# Altium PCB PCB_Hist_Prep.PcbDoc
Units mil, origin at the board's own origin, x right, y up, seen from the top; angles counter-clockwise.
Board outline 1968.5 x 2755.91 mil, 2 copper layers (Top Layer, Bottom Layer); 16 components, 28 nets, 91 pads, 9 vias.
Unrouted connection lines stored in the file: 1.
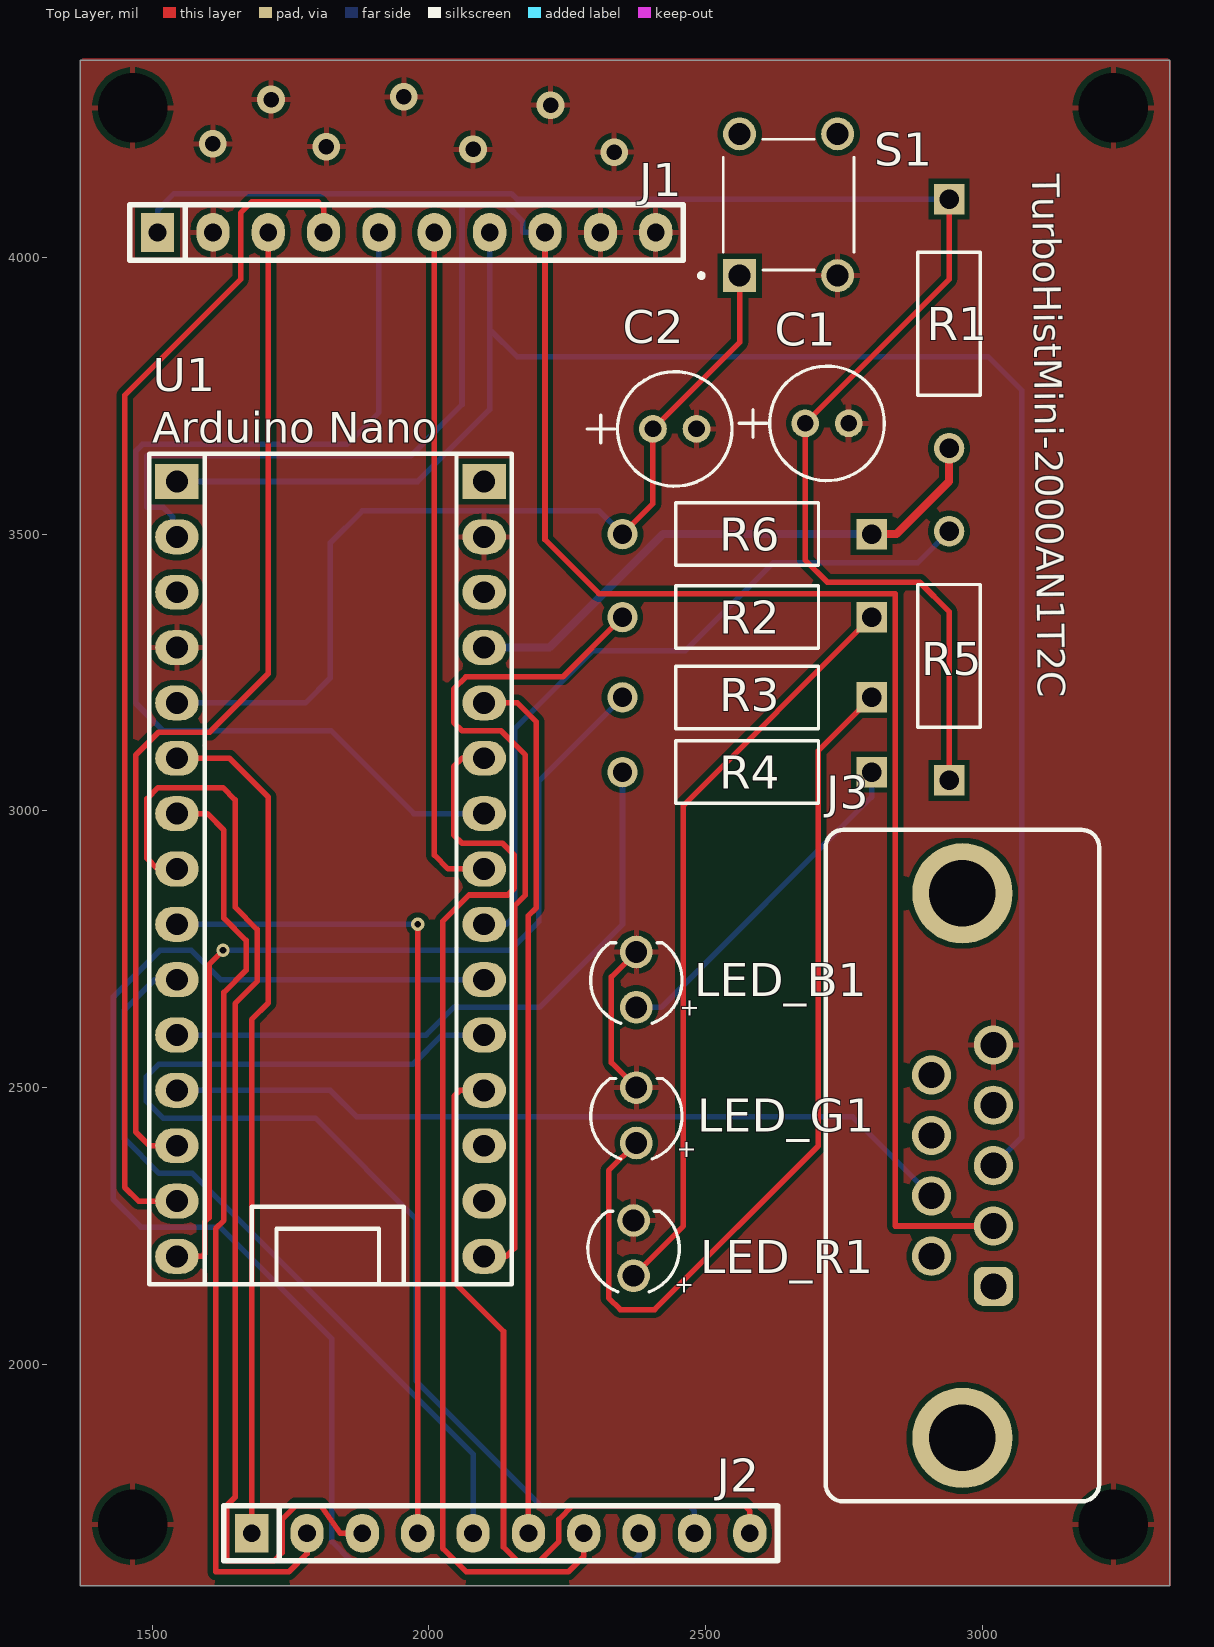
[diagram p0: Top Layer view]
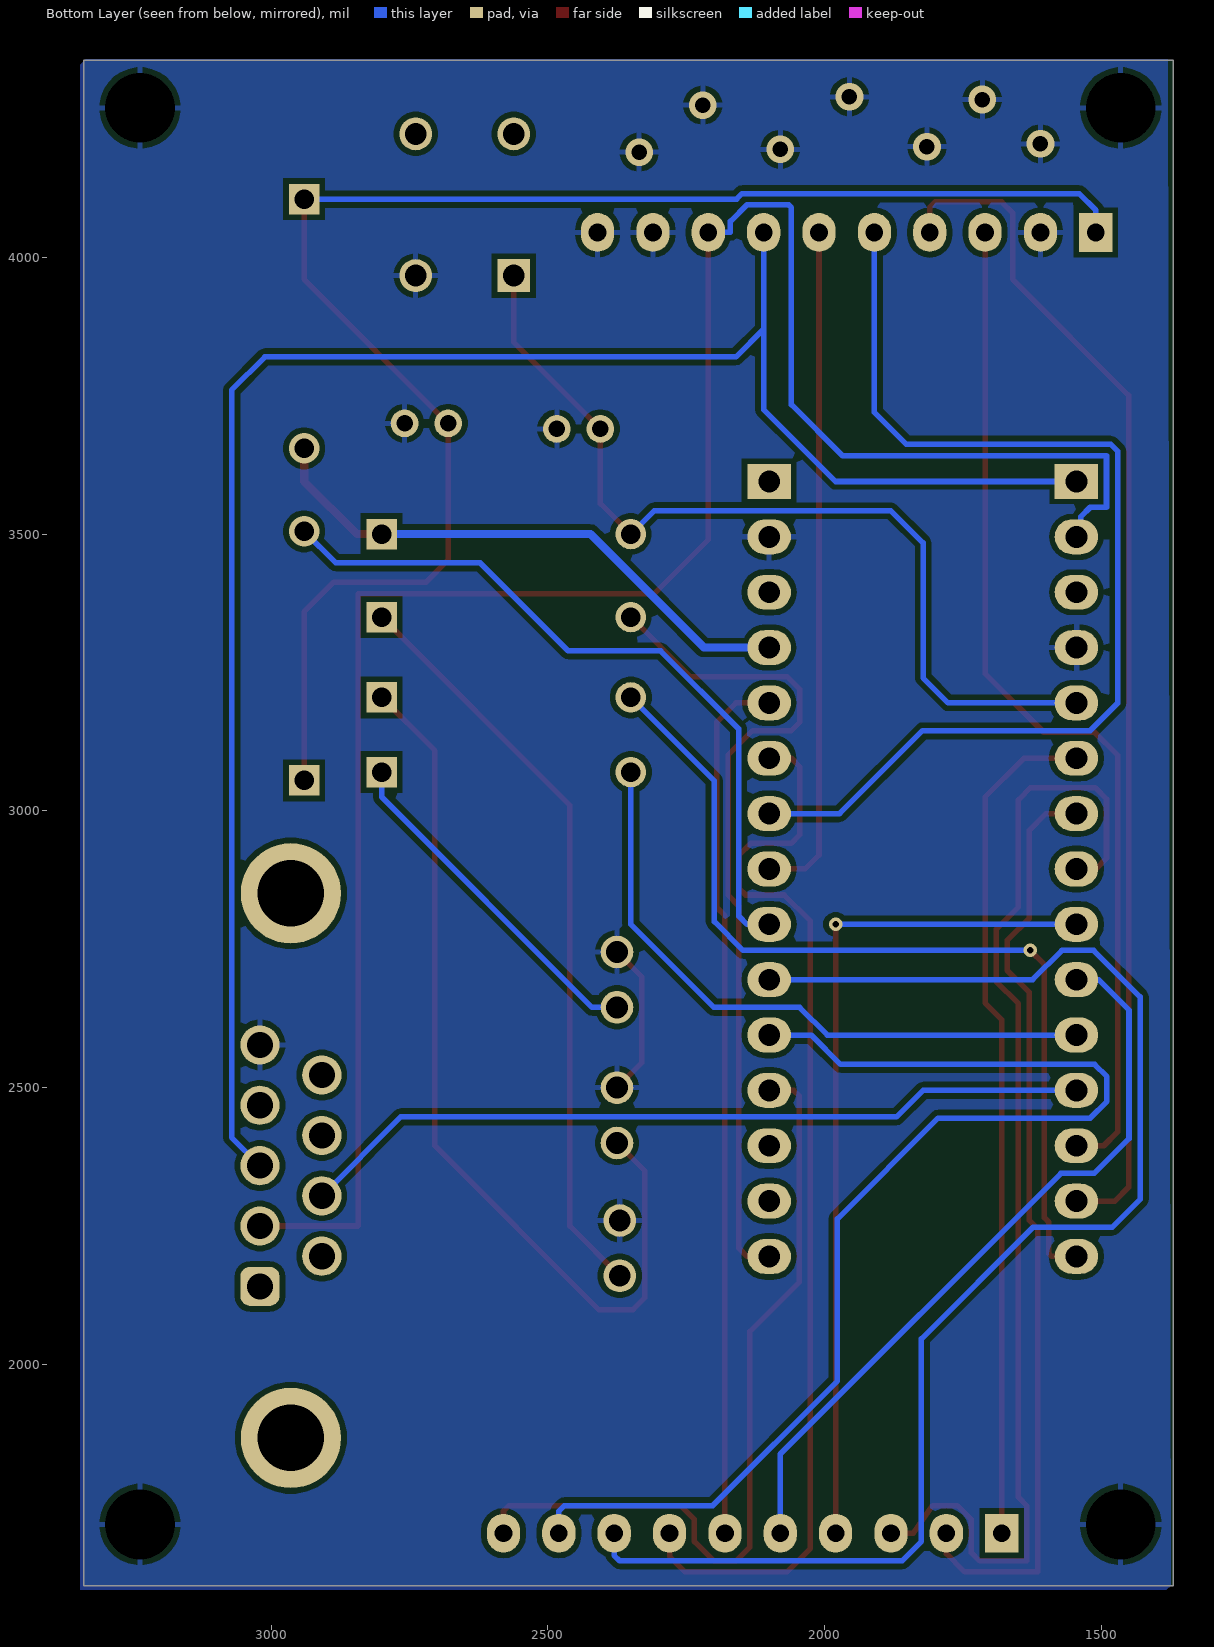
[diagram p1: Bottom Layer view, seen from below]
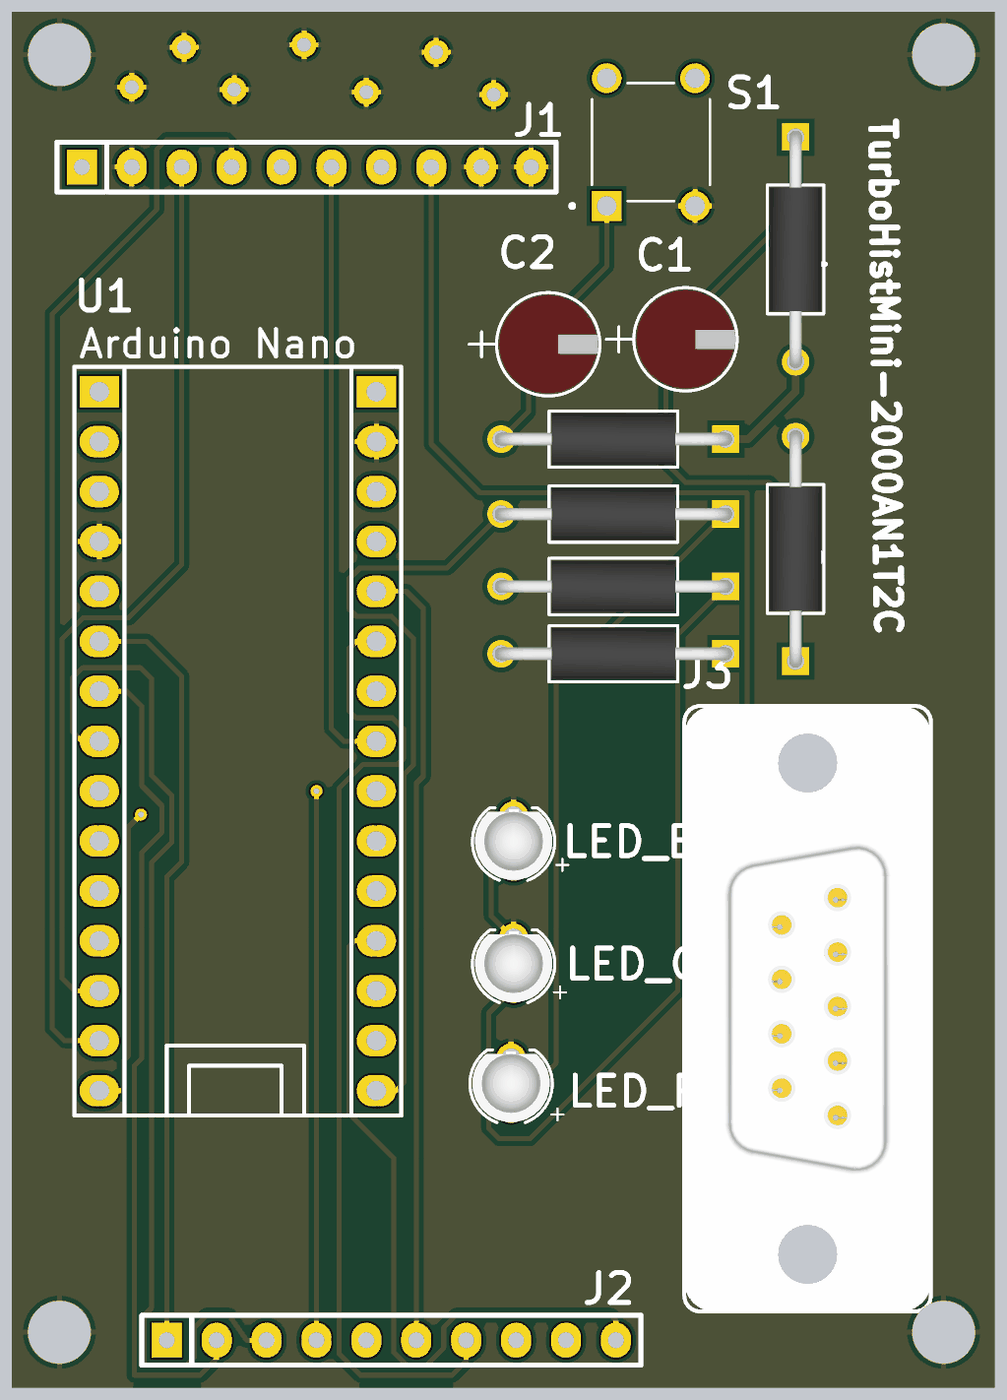
[diagram p2: 3D render of the assembled board from above, using the file's embedded part models]

## Layer stack, top to bottom
Top Solder: solder mask 0.4, Solder Resist, Dk 3.5
Top Layer: signal copper 1.4
Dielectric 1: dielectric 12.6, FR-4, Dk 4.8
Bottom Layer: signal copper 1.4
Bottom Solder: solder mask 0.4, Solder Resist, Dk 3.5

## Board outline
1370,1600 1370,4355.91 3338.5,4355.91 3338.5,1600
board region "Layer Stack Region 1": 1370,1600 1370,4355.91 3338.5,4355.91 3338.5,1600
board region "Default Layer Stack Region": 1000,1000 7000,1000 7000,5000 1000,5000

## Design rules (kind name [scope] priority, off if disabled: settings)
Clearance [All] p1: gap=10 ignorepadtopadclearanceinfootprint=FALSE
PolygonConnect [All] p1: connectstyle=Relief reliefconductorwidth=10 reliefentries=4 polygonreliefangle="90 Angle" airgapwidth=10
RoutingVias [All] p1: holewidth=12 width=24 viastyle="Through Hole" minholewidth=2 minwidth=5 maxholewidth=28 maxwidth=50
SolderMaskExpansion [All] p1: expansion=4 istentingtop=FALSE
SupplyNets "Schematic Supply Nets_2" [InNet('GND')] p1: voltage=0.000
SupplyNets "Schematic Supply Nets_1" [InNet('VCC')] p2: voltage=0.000
Width Width_1 [InNet('VCC')] p1: maxlimit=18 minlimit=10 preferedwidth=15 minimp=50.000000 maximp=50.000000 favimp=50.000000
Width [All] p2: maxlimit=10 minlimit=10 preferedwidth=10
30 further rules are at their usual default settings.

## Components (designator, comment, footprint, x,y, rotation, side; value= is the part's Value field where it differs from the comment)
C1 "100uF" CAP_UKL_5X11_NCH 2680,3700 r0 top
C2 "0.1uF" CAP_UKL_5X11_NCH 2405,3690 r0 top
J1 "CON10" sip10 1510,4045 r0 top
J2 "CON10" sip10 1680,1695 r0 top
J3 "61800925123" 61800925123 2964.09,2359.06 r270 top
LED_B1 "Super Red, 2V, 40°" WL-TMRC_D3.95H5.3 2375,2695 r90 top
LED_G1 "Super Red, 2V, 40°" WL-TMRC_D3.95H5.3 2375,2450 r90 top
LED_R1 "Super Red, 2V, 40°" WL-TMRC_D3.95H5.3 2370,2210 r90 top
R1 "10K" STA_CF14_STP 2940,4105 r270 top
R2 "2.2" STA_CF14_STP 2800,3350 r180 top
R3 "10K" STA_CF14_STP 2800,3205 r180 top
R4 "10K" STA_CF14_STP 2800,3070 r180 top
R5 "330" STA_CF14_STP 2940,3055 r90 top
R6 "4.7K" STA_CF14_STP 2800,3500 r180 top
S1 "TS02-66-43-BK-100-LCR-D" SW_TS02-66-43-BK-100-LCR-D 2650,4095 r90 top
U1 "Arduino Nano" PCBComponent_1 1815,2855 r90 top

## Footprints (in the part's own frame and the unit in brackets; to place one, negate y for a bottom-side part, rotate by r counter-clockwise, add the part's x,y. Pads: shape width x height; smd on the part's side, far side on the other; paste and mask are expansions set on the pad)
61800925123 [mm] "9 pins, straight"
  rrect50% 1.8x1.8 hole 1.2: 1(5.54,1.42)
  round 1.8 hole 1.2: 2(2.77,1.42) 3(0,1.42) 4(-2.77,1.42) 5(-5.54,1.42) 6(4.155,-1.42) 7(1.385,-1.42) 8(-1.385,-1.42) 9(-4.155,-1.42)
  round 4.6 hole 3.05: M1(-12.495,0) M2(12.495,0)
  silkscreen extent -15.41,-6.27 15.4,6.28, body extent -15.4,-6.27 15.4,6.27, height 12.95
CAP_UKL_5X11_NCH [mil]
  round 50 / inner round 60 / far side round 50 hole 30 paste-99999 mask+0: 1(0,0) 2(78.74,0)
  silkscreen extent -119,-103 143,103, body extent -59,-98 139,98, height 473
PCBComponent_1 [mm]
  rect 1.6x2 hole 1: 1(18.796,6.858) 30(18.796,-7.239)
  oval 1.6x2 hole 1: 2(16.256,6.858) 3(13.716,6.858) 4(11.176,6.858) 5(8.636,6.858) 6(6.096,6.858) 7(3.556,6.858) 8(1.016,6.858) 9(-1.524,6.858) 10(-4.064,6.858) 11(-6.604,6.858) 12(-9.144,6.858) 13(-11.684,6.858) 14(-14.224,6.858) 15(-16.764,6.858) 16(-16.764,-7.239) 17(-14.224,-7.239) 18(-11.684,-7.239) 19(-9.144,-7.239) 20(-6.604,-7.239) 21(-4.064,-7.239) 22(-1.524,-7.239) 23(1.016,-7.239) 24(3.556,-7.239) 25(6.096,-7.239) 26(8.636,-7.239) 27(11.176,-7.239) 28(13.716,-7.239) 29(16.256,-7.239)
  silkscreen extent -18.03,-8.51 20.07,8.13
sip10 [mil]
  rect 60x70 hole 32: 1(0,0)
  oval 60x70 hole 32: 2(100,0) 3(200,0) 4(300,0) 5(400,0) 6(500,0) 7(600,0) 8(700,0) 9(800,0) 10(900,0)
  silkscreen extent -50,-50 950,50
STA_CF14_STP [mil]
  rect 55x55 / inner round 60 / far side rect 55x55 hole 35 paste-99999 mask+0: 1(0,0)
  round 55 / inner round 60 / far side round 55 hole 35 paste-99999 mask+0: 2(450,0)
  silkscreen extent 96,-56 354,57, body extent -12,-51 462,51, height 103
SW_TS02-66-43-BK-100-LCR-D [mm]
  rect 1.508x1.508 / inner round 1.508 / far side rect 1.508x1.508 hole 1: 1(-3.25,2.25)
  round 1.508 hole 1: 2(3.25,2.25) 3(-3.25,-2.25) 4(3.25,-2.25)
  silkscreen extent -3.35,-3 3,4.1
WL-TMRC_D3.95H5.3 [mm] "THT Mono-color Round Color LED, 2-leads"
  round 1.5 hole 1: 1(-1.27,0) 2(1.27,0)
  silkscreen extent -2,-2.1 1.69,2.1, body extent -1.99,-1.97 1.63,1.97, height 5.35

## Part data
C1 C2: library part UKL1H0R1MDDANATA, "No Description Available", Mfr_Name=Nichicon
J3: "WR-DSUB Female PCB Connector, Straight, 9p", Contact Resistance=300mOhm, Manufacturer="Wurth Elektronik", Operating Temperature Max=105°C, Operating Temperature Min=-55°C, Rated Current=3A, Withstanding Voltage=1000VAC, Working Voltage=125VAC, Category="Input/Output Connectors", ComponentLink1Description="Website Link", ComponentLink1URL=https://www.we-online.com/redexpert/article/61800925123?ad, ComponentLink2Description="Datasheet Link", ComponentLink2URL=https://www.we-online.com/redexpert/spec/61800925123?ad, Gender=Female, Manufacturer Part Number=61800925123, Match Code=WR-DSUB, Mount="Through Hole", Number of Pins=9, Orientation=Straight, Packaging=Tube
LED_B1 LED_G1 LED_R1: library part 151031SS04000, "WL-TMRC Mono-color Round Color, THT, D3.95 x H5.3mm, Super Red, 2V, 40°", Case/Size Code=3mm, Emitting Color="Super Red", Forward Voltage=2V, Manufacturer="Wurth Elektronik", Operating Temperature Max=85°C, Operating Temperature Min=-40°C, Category="Signal LEDs", Chip Technology=AlInGaP, ComponentLink1Description="Website Link", ComponentLink1URL=https://www.we-online.com/redexpert/article/151031SS04000?ad, ComponentLink2Description="Datasheet Link", ComponentLink2URL=https://www.we-online.com/redexpert/spec/151031SS04000?ad, Diameter=3.95mm, Dominant Wavelength=635nm, Height=5.3mm, Luminous Intensity=160mcd, Manufacturer Part Number=151031SS04000, Match Code=WL-TMRC, Mount="Through Hole", Packaging=Bulk, Peak Wavelength=640nm, Viewing Angle=40°
R1 R2 R3 R4 R5 R6: library part CF14JT1K00, "No Description Available", Mfr_Name="Stackpole International"
S1: "6 x 6 mm, 4.3 mm Actuator Height, 100 gf, Black, Long Crimped, Through Hole, SPST, Tactile Switch", Package=None, Availability="In Stock", Check_prices=https://www.snapeda.com/parts/TS02-66-43-BK-100-LCR-D/CUI+Devices/view-part/?ref=eda, CUI_purchase_URL=https://www.cuidevices.com/product/switches/tactile-switches/ts02-series?utm_source=snapeda.com&utm_medium=referral&utm_campaign=snapedaBOM, MF="CUI Devices", MP=TS02-66-43-BK-100-LCR-D, Price=None, Purchase-URL=https://pricing.snapeda.com/search/part/TS02-66-43-BK-100-LCR-D/?ref=eda, SnapEDA_Link=https://www.snapeda.com/parts/TS02-66-43-BK-100-LCR-D/CUI+Devices/view-part/?ref=snap
U1: library part Component_1

## Free pads (board coordinates)
  round 60 hole 125.98: 12(1465,1710.94) 12(1465,4270) 13(3236.65,1710.94) 14(3236.65,4270)

## Via types
v1: diameter 50, hole 28, Top Layer to Bottom Layer, 7 vias
v2: diameter 24, hole 12, Top Layer to Bottom Layer, 2 vias

## Nets (pads, with @x,y where several pads share a name; then routed paths per layer and width w, separated by ;. In a path a pad name is that pad's centre, name@x,y a point inside that pad or via, vN(x,y) a via of type N, cw(c..) or ccw(c..) an arc to the next point about the centre after c; other vN are vias at no path point)
A0: J2.10 U1.19 | length 1474.7
  Top Layer w10: U1.19 2056,2495 2045.63,2484.63 2045.63,2149 2135,2059.63 2135,1670 2160,1645 2200,1645 2235,1680 2235,1720 2260,1745 2570,1745 2580,1735 J2.10
A1: J2.9 U1.20 | length 2194.2
  Bottom Layer w10: U1.20 2024,2595 1971,2542 1512,2542 1490,2520 1490,2475 1520,2445 1795,2445 1977,2263 1977,1970 2202,1745 2470,1745 2480,1735 J2.9
A2: J2.8 U1.21 | length 2571.8
  Bottom Layer w10: U1.21 1624,2695 1571,2748 1514,2748 1430,2664 1430,2298 1480,2248 1623,2248 1825,2046 1825,1680 1860,1645 2370,1645 2380,1655 J2.8
A6: J2.7 U1.25 | length 1981.3
  Top Layer w10: U1.25 2060,3095 2045,3080 2045,2956.5 2060,2941.5 2132.87,2941.5 2154.37,2920 2154.37,2860 2142.37,2848 2073,2848 2025.63,2800.63 2025.63,1667.37 2068,1625 2252,1625 2280,1653 J2.7
A7: J2.6 U1.26 | length 1580.2
  Top Layer w10: U1.26 2160,3195 2194.37,3160.63 2194.37,2825 2180,2810.63 J2.6
COOL_PWM: J1.4 U1.14 | length 2158.9
  Top Layer w10: U1.14 1475.63,2295 1450.63,2320 1450.63,3750.63 1660,3960 1660,4080 1680,4100 1800,4100 1810,4090 J1.4
D3: J2.1 U1.6 | length 1536.4
  Top Layer w10: U1.6 1640,3095 1710,3025 1710,2653 1680,2623 J2.1
D4: J2.2 U1.7 | length 1692.4
  Top Layer w10: U1.7 1600,2995 1630,2965 1630,2806 1670,2766 1670,2712 1630,2672 1630,2260 1615,2245 1615,1625 1747,1625 1780,1658 J2.2
D5: J2.3 U1.8 | length 2108.5
  Top Layer w10: U1.8 1510,2895 1490.63,2914.37 1490.63,3021.63 1511,3042 1628,3042 1650,3020 1650,2826 1690,2786 1690,2692 1650,2652 1650,1760 1635,1745 1635,1645 1720,1645 1735,1660 1735,1720 1760,1745 1805,1745 1840,1695 J2.3
D6: J2.4 U1.9 | length 1535
  Top Layer w10: J2.4 v2(1980,2795)
  Bottom Layer w10: U1.9 v2(1980,2795)
D7: J2.5 U1.10 | length 1358.9
  Bottom Layer w10: U1.10 1505,2695 1450,2640 1450,2408 1513,2345 1573,2345 2080,1838 J2.5
GND: C1.2 C2.2 J1.2 J1.9 J1.10 J3.5 LED_B1.2 LED_G1.2 LED_R1.2 pad.12 pad.13 pad.14 S1.3 U1.4 U1.29 | length 282.3
  Top Layer w10: LED_G1.2 2330,2545 2330,2700 LED_B1.2
  other v1: 2335,4190 2080,4195 1815,4200 1610,4205 2220,4275 1715,4285 1955,4290
HEAT_PWM: J1.3 U1.13 | length 1862.8
  Top Layer w10: U1.13 1495.63,2395 1470.63,2420 1470.63,3100.63 1512,3142 1604,3142 1710,3248 J1.3
LED_B: R4.2 U1.11 | length 1162.8
  Bottom Layer w10: U1.11 1995,2595 2045,2645 2200,2645 2350,2795 R4.2
LED_G: R3.2 U1.15 | length 1673.6
  Top Layer w10: U1.15 1590,2195 1595,2200 1595,2257 1603,2265 1603,2722.63 v2(1628.37,2748)
  Bottom Layer w10: v2(1628.37,2748) 2147,2748 2199,2800 2199,3054 R3.2
LED_R: R2.2 U1.16 | length 1532.7
  Top Layer w10: U1.16 2140,2195 2155,2210 2155,2828.5 2174.37,2847.87 2174.37,3100.63 2130,3145 2060,3145 2045,3160 2045,3220 2067,3242 2242,3242 R2.2
NetLED_B1_1: LED_B1.1 R4.1 | length 627.4
  Bottom Layer w10: LED_B1.1 2420,2645 2800,3025 R4.1
NetLED_G1_1: LED_G1.1 R3.1 | length 1660.8
  Top Layer w10: LED_G1.1 2325,2350 2325,2120 2346,2099 2408,2099 2704,2395 2704,3109 R3.1
NetLED_R1_1: LED_R1.1 R2.1 | length 1368.1
  Top Layer w10: LED_R1.1 2460,2250 2460,3010 R2.1
RTS: J3.7 U1.12 | length 1442.1
  Bottom Layer w10: U1.12 1822,2495 1870,2447 2765.72,2447 J3.7
RX: J1.8 J3.2 U1.2 | length 3886.7
  Top Layer w10: J1.8 2210,3490 2307.5,3392.5 2842.5,3392.5 2842.5,2250.5 2843,2250 J3.2
  Bottom Layer w10: U1.2 1537,3495 1537,3531.5 1520,3548.5 1490.63,3548.5 1490.63,3641.5 1967.5,3641.5 2060,3734 2060,4090 2065,4095 2140,4095 2170,4065 2170,4045 J1.8
SCL: J1.5 U1.24 | length 1960.9
  Bottom Layer w10: J1.5 1910,3720 1852,3662 1482.63,3662 1470.63,3650 1470.63,3194.37 1520,3145 1823,3145 1973,2995 U1.24
SDA: J1.6 U1.23 | length 1225.4
  Top Layer w10: J1.6 2010,2920 2035,2895 U1.23
SW: C2.1 R6.2 S1.1 U1.5 | length 1663.7
  Top Layer w10: R6.2 2405,3555 C2.1 2561.42,3846.42 S1.1
  Bottom Layer w10: U1.5 1777,3195 1822,3240 1822,3484 1880,3542 2308,3542 R6.2
TRM: C1.1 J1.1 R1.1 R5.1 | length 2849.8
  Top Layer w10: R5.1 2940,3360 2887,3413 2720,3413 2680,3453 C1.1 2940,3960 R1.1
  Bottom Layer w10: J1.1 1510,4085 1540,4115 2149,4115 2159,4105 R1.1
TRM_PIN: R5.2 U1.22 | length 1332.1
  Bottom Layer w10: U1.22 2140,2795 2155,2810 2155,3148 2296,3289 2463,3289 2622,3448 2883,3448 R5.2
TX: J1.7 J3.3 U1.1 | length 3367.5
  Bottom Layer w10: U1.1 1980,3595 2110,3725 2110,3870 ; J1.7 2110,3870 ; J3.3 3071,2410.06 3071,3760 3011,3820 2160,3820 2110,3870
VCC: R1.2 R6.1 U1.27 | length 1024.3
  Top Layer w15: R6.1 2845,3500 2940,3595 R1.2
  Bottom Layer w15: U1.27 2218,3295 2423,3500 R6.1
pads on no net: J3.1 J3.4 J3.6 J3.8 J3.9 J3.M1 J3.M2 S1.2 S1.4 U1.3 U1.17 U1.18 U1.28 U1.30

## Polygon pours and split planes (outlines as drawn)
GND on Bottom Layer "GND_L02_P002" (solid, remove dead copper, pour order 2): 1380,4357.5 3335,4357.5 3345,4347.5 3345,1592.5 1380,1592.5 1375,1597.5
GND on Top Layer "GND_L01_P000" (solid, remove dead copper, pour order 0): 1370,4355 1375,4360 3335,4360 3340,4355 3340,1600 1370,1600 1370,4360

## Silkscreen, mask and mechanical layers (free items; w line width, h text height)
Top Overlay:
  text "TurboHistMini-2000AN1T2C" at 3090.16,4150.17 h50 r270.63
Mechanical 1:
  the board outline again, w10

## Text inside footprints (layer, text, board x,y; h text height)
LED_B1: Top Overlay "+" at 2485,2625 h31.5 r90
LED_G1: Top Overlay "+" at 2480,2370 h31.5 r90
LED_R1: Top Overlay "+" at 2475,2125 h31.5 r90